# Altium PCB Anemoia-ESP32-SMD.PcbDoc (part 2 of 3)
Units mm, origin at the board's own origin, x right, y up, seen from the top; angles counter-clockwise.
Board outline 118.5 x 51 mm, 2 copper layers (Top Layer, Bottom Layer), stack 1.57 mm thick; 96 components, 75 nets, 376 pads, 286 vias.
Unrouted connection lines stored in the file: 8.
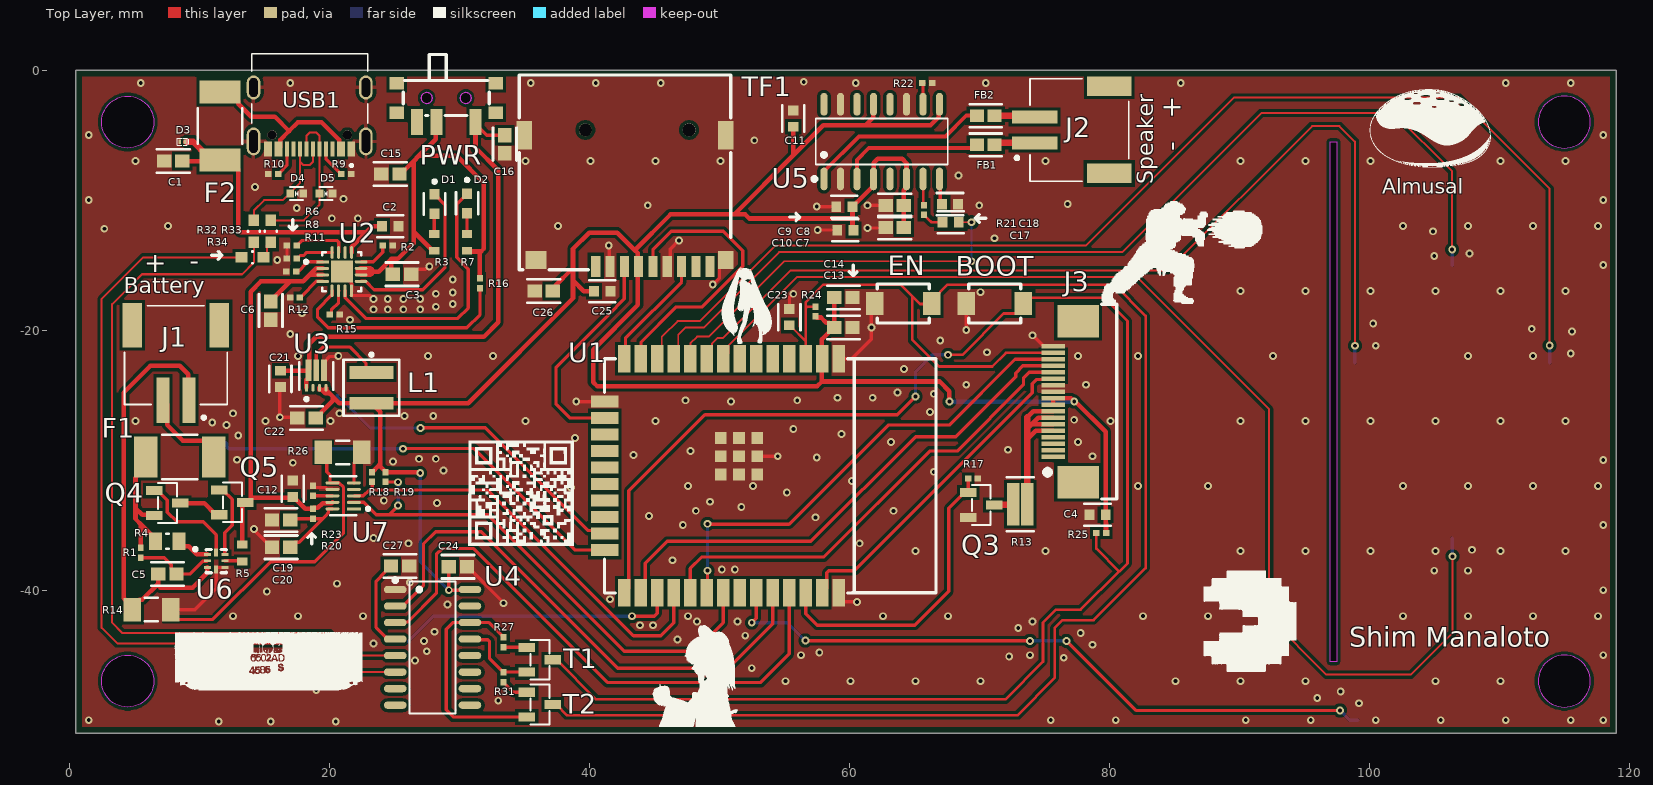
[diagram p0: Top Layer view]

## Part data (continued)
FB1 FB2: library part BLM18EG221SN1D, "Chip Ferrite Bead, 0603, 220Ω @ 100MHz, 0.05Ω, 25%, 2A", Case Code (Imperial)=0603, Case Code (Metric)=1608, Current Rating=1A, DC Current=2A, DC Resistance (DCR)=50mΩ, Frequency=100MHz, Manufacturer=Murata, Max Frequency=1GHz, Max Operating Temperature=125°C, Min Operating Temperature=-55°C, Resistance=220Ω, Tolerance=25%, Case/Package=0603, Category="Ferrite Beads and Chips", ComponentLink1Description=https://datasheet.octopart.com:443/BLM18EG221SN1D-Murata-datasheet-180806761.pdf?src-supplier=IHS, ComponentLink1URL=https://datasheet.octopart.com:443/BLM18EG221SN1D-Murata-datasheet-180806761.pdf?src-supplier=IHS, ComponentLink2Description=https://datasheet.octopart.com:443/BLM18EG221SN1D-Murata-datasheet-113093584.pdf?src-supplier=Ciiva, ComponentLink2URL=https://datasheet.octopart.com:443/BLM18EG221SN1D-Murata-datasheet-113093584.pdf?src-supplier=Ciiva, ComponentLink3Description=https://datasheet.octopart.com:443/BLM18EG221SN1D-Murata-datasheet-141257933.pdf?src-supplier=Ciiva, ComponentLink3URL=https://datasheet.octopart.com:443/BLM18EG221SN1D-Murata-datasheet-141257933.pdf?src-supplier=Ciiva, ComponentLink4Description=https://datasheet.octopart.com:443/BLM18EG221SN1D-Murata-datasheet-138706987.pdf?src-supplier=Ciiva, ComponentLink4URL=https://datasheet.octopart.com:443/BLM18EG221SN1D-Murata-datasheet-138706987.pdf?src-supplier=Ciiva, ComponentLink5Description=https://datasheet.octopart.com:443/BLM18EG221SN1D-Murata-datasheet-66919.pdf?src-supplier=element14+APAC, ComponentLink5URL=https://datasheet.octopart.com:443/BLM18EG221SN1D-Murata-datasheet-66919.pdf?src-supplier=element14+APAC, ComponentLink6Description=https://datasheet.octopart.com:443/BLM18EG221SN1D-Murata-datasheet-11550679.pdf?src-supplier=_legacy+Avnet, ComponentLink6URL=https://datasheet.octopart.com:443/BLM18EG221SN1D-Murata-datasheet-11550679.pdf?src-supplier=_legacy+Avnet, ComponentLink7Description=https://datasheet.octopart.com:443/BLM18EG221SN1D-Murata-datasheet-8330444.pdf?src-supplier=_legacy+Avnet, ComponentLink7URL=https://datasheet.octopart.com:443/BLM18EG221SN1D-Murata-datasheet-8330444.pdf?src-supplier=_legacy+Avnet, ComponentLink8Description=https://datasheet.octopart.com:443/BLM18EG221SN1D-Murata-datasheet-584887.pdf?src-supplier=_legacy+Avnet, ComponentLink8URL=https://datasheet.octopart.com:443/BLM18EG221SN1D-Murata-datasheet-584887.pdf?src-supplier=_legacy+Avnet, ComponentLink9Description=https://datasheet.octopart.com:443/BLM18EG221SN1D-Murata-datasheet-135086659.pdf?src-supplier=TME, ComponentLink9URL=https://datasheet.octopart.com:443/BLM18EG221SN1D-Murata-datasheet-135086659.pdf?src-supplier=TME, ComponentLink10Description=https://datasheet.octopart.com:443/BLM18EG221SN1D-Murata-datasheet-151955971.pdf?src-supplier=SOS+electronic, ComponentLink10URL=https://datasheet.octopart.com:443/BLM18EG221SN1D-Murata-datasheet-151955971.pdf?src-supplier=SOS+electronic, ComponentLink11Description=https://datasheet.octopart.com:443/BLM18EG221SN1D-Murata-datasheet-62086310.pdf?src-supplier=Future+Electronics, ComponentLink11URL=https://datasheet.octopart.com:443/BLM18EG221SN1D-Murata-datasheet-62086310.pdf?src-supplier=Future+Electronics, ComponentLink12Description=https://datasheet.octopart.com/BLM18EG221SN1D-Murata-datasheet-37129980.pdf, ComponentLink12URL=https://datasheet.octopart.com/BLM18EG221SN1D-Murata-datasheet-37129980.pdf, ComponentLink13Description=http://sigma.octopart.com:80/reach_statement/Murata-company-16.pdf?src-supplier=Compliance+Statements, ComponentLink13URL=http://sigma.octopart.com:80/reach_statement/Murata-company-16.pdf?src-supplier=Compliance+Statements, Contact Plating=Tin, Core Material=Ferrite, Depth=800µm, Height=800µm, Impedance=260Ω, Lead Free="Lead Free", Length=1.6mm, Lifecycle Status=Production, Manufacturer Part Number=BLM18EG221SN1D, Material="Ferrite, Steel", Max Current Rating=2A, Max DC Current=2A, Military Standard=Not, Number of Circuits=1, Number of Lines=1, Number of Pins=2, Number of Terminals=2, Packaging="Cut Tape", Radiation Hardening=No, REACH SVHC=Yes, RMS Current (Irms)=2A, RoHS=Compliant, Schedule B="8504500000, 8504500000|8504500000|8504500000|8504500000|8504500000", Series Resistance=50mΩ, Stock 1=154402, Supplier 1=DigiKey, Termination=SMD/SMT, Test Frequency=100MHz, Width=800µm
J1 J2: library part S2B-PH-SM4-TB(LF)(SN), "2P 1x2P PH Tin -25℃~+85℃ Beige 2mm 100V 2 2A 1 Surface Mount, Right Angle SMD,P=2mm,Surface Mount,Right Angle Headers, Male Pins RoHS", Color="Black, White", Contact Resistance=20mΩ, Current Rating=2A, Dielectric Material=Polyamide, Flammability Rating="UL94 V-0", Housing Color=Natural, Insulation Resistance=1GΩ, Manufacturer=JST, Max Operating Temperature=85°C, Max Voltage Rating (AC)=100V, Min Operating Temperature=-25°C, Category="Headers and Wire Housings", China RoHS=Compliant, ComponentLink1Description=https://datasheet.octopart.com:443/S2BPHSM4TBLFSN-JST-datasheet-147762421.pdf?src-supplier=Upverter, ComponentLink1URL=https://datasheet.octopart.com:443/S2BPHSM4TBLFSN-JST-datasheet-147762421.pdf?src-supplier=Upverter, ComponentLink2Description=https://datasheet.octopart.com:443/S2B-PH-SM4-TB%28LF%29%28SN%29-JST-datasheet-10411123.pdf?src-supplier=Upverter, ComponentLink2URL=https://datasheet.octopart.com:443/S2B-PH-SM4-TB%28LF%29%28SN%29-JST-datasheet-10411123.pdf?src-supplier=Upverter, ComponentLink3Description=https://datasheet.octopart.com:443/S2B-PH-SM4-TB%28LF%29%28SN%29-JST-datasheet-8324864.pdf?src-supplier=Upverter, ComponentLink3URL=https://datasheet.octopart.com:443/S2B-PH-SM4-TB%28LF%29%28SN%29-JST-datasheet-8324864.pdf?src-supplier=Upverter, ComponentLink4Description=https://datasheet.octopart.com:443/S2B-PH-SM4-TB%28LF%29%28SN%29-JST-datasheet-180491729.pdf?src-supplier=IHS, ComponentLink4URL=https://datasheet.octopart.com:443/S2B-PH-SM4-TB%28LF%29%28SN%29-JST-datasheet-180491729.pdf?src-supplier=IHS, ComponentLink5Description=https://datasheet.octopart.com:443/S2B-PH-SM4-TB%28LF%29%28SN%29-JST-datasheet-15068535.pdf?src-supplier=SOS+electronic, ComponentLink5URL=https://datasheet.octopart.com:443/S2B-PH-SM4-TB%28LF%29%28SN%29-JST-datasheet-15068535.pdf?src-supplier=SOS+electronic, ComponentLink6Description=https://datasheet.octopart.com:443/S2B-PH-SM4-TB%28LF%29%28SN%29-JST-datasheet-12510261.pdf?src-supplier=TME, ComponentLink6URL=https://datasheet.octopart.com:443/S2B-PH-SM4-TB%28LF%29%28SN%29-JST-datasheet-12510261.pdf?src-supplier=TME, ComponentLink7Description=https://datasheet.octopart.com:443/S2B-PH-SM4-TB%28LF%29%28SN%29-JST-datasheet-56537.pdf?src-supplier=Future+Electronics, ComponentLink7URL=https://datasheet.octopart.com:443/S2B-PH-SM4-TB%28LF%29%28SN%29-JST-datasheet-56537.pdf?src-supplier=Future+Electronics, ComponentLink8Description=https://datasheet.octopart.com:443/S2B-PH-SM4-TB-%28LF%29%28SN%29-JST-datasheet-165061721.pdf?src-supplier=Burklin+Elektronik, ComponentLink8URL=https://datasheet.octopart.com:443/S2B-PH-SM4-TB-%28LF%29%28SN%29-JST-datasheet-165061721.pdf?src-supplier=Burklin+Elektronik, ComponentLink9Description=https://datasheet.octopart.com:443/S2B-PH-SM4-TB%28LF%29%28SN%29-JST-datasheet-515537.pdf?src-supplier=Farnell, ComponentLink9URL=https://datasheet.octopart.com:443/S2B-PH-SM4-TB%28LF%29%28SN%29-JST-datasheet-515537.pdf?src-supplier=Farnell, ComponentLink10Description=https://datasheet.octopart.com:443/S2B-PH-SM4-TB-%28LF%29-%28SN%29-JST-datasheet-159515011.pdf?src-supplier=Amar+Radio+Corporation, ComponentLink10URL=https://datasheet.octopart.com:443/S2B-PH-SM4-TB-%28LF%29-%28SN%29-JST-datasheet-159515011.pdf?src-supplier=Amar+Radio+Corporation, Connector Type="Male Pin", Contact Gender=Male, Contact Material="Bronze, Copper, Tin", Contact Mating Length=3.302mm, Contact Plating=Tin, Depth=7.6mm, Fastening Type=Detent, Gender=Male, Height=5.5mm, Housing Material=Nylon, Lead Free="Lead Free", Lead Pitch=2mm, Length=11.9mm, Lifecycle Status=Production, Manufacturer Part Number=S2B-PH-SM4-TB(LF)(SN), Material=Polyamide, Max Current Rating=2A, Max Voltage Rating (DC)=100V, Mount="Through Hole", Number of Contacts=2, Number of Pins=2, Number of Poles=2, Number of Positions=2, Number of Rows=1, Packaging=Bulk, Pitch=2mm, Radiation Hardening=No, REACH SVHC=Yes, RoHS=Compliant, Stock 1=28429, Supplier 1=Mouser, Terminal Pitch=2mm, Termination="Crimp, Solder", Voltage Rating=100V, Voltage Rating (AC)=100V, Voltage Rating (DC)=100V, Weight=28.349523g, Width=2.34mm, Working Voltage=100V
J3: library part HC-FPC-0.5-18P-CXH20, "CONN FFC FPC 18POS 0.5mm BOTTOM CNT SMD R/A"
L1: library part XFL4015-471MEC, "FIXED IND 470nH SMD,4x4mm"
PWR: library part MK-12C02-G020, "Surface Mount, Right Angle 1A SPDT 6V Black 10,000 Cycles SMD,6.6x1.4mm Slide Switches RoHS"
Q3 Q4 Q5: library part AO3402, "MOSFET N-CH 30V SOT-23"
R1: library part RC0402FR-07300RL, "RES 300Ω ±1% 62.5mW 0402"
R2: library part RC0402FR-071K18L, "RES 1.18kΩ ±1% 62.5mW 0402"
R3 R5 R7: library part RC0603FR-071K5L, "RES 1.5kΩ ±1% 100mW 0603"
R4: library part RC0805FR-0720RL, "RES 20Ω ±1% 125mW 0805"
R6: library part RC0402FR-074K12L, "RES 4.12kΩ ±1% 62.5mW 0402"
R8 R15 R16 R20 R23: library part RC0402FR-071KL, "RES 1kΩ ±1% 62.5mW 0402", Case Code (Imperial)=0402, Manufacturer="Yageo Group", Max Operating Temperature=155°C, Min Operating Temperature=-55°C, Power Dissipation=62.5mW, Power Rating=63mW, Resistance=1kΩ, Temperature Coefficient=100ppm/°C, Tolerance=1%, Voltage Rating=50V, Case Code (Metric)=0402, Case/Package=0402, Category="Chip SMD Resistors", China RoHS=Non-Compliant, ComponentLink1Description=https://datasheet.octopart.com:443/RC0402FR-071KL-Yageo-datasheet-175887523.pdf?src-supplier=IHS, ComponentLink1URL=https://datasheet.octopart.com:443/RC0402FR-071KL-Yageo-datasheet-175887523.pdf?src-supplier=IHS, ComponentLink2Description=https://datasheet.octopart.com:443/RC0402FR-071KL-Yageo-datasheet-164759695.pdf?src-supplier=Upverter, ComponentLink2URL=https://datasheet.octopart.com:443/RC0402FR-071KL-Yageo-datasheet-164759695.pdf?src-supplier=Upverter, ComponentLink3Description=https://datasheet.octopart.com:443/RC0402FR-071KL-Yageo-datasheet-103092701.pdf?src-supplier=Upverter, ComponentLink3URL=https://datasheet.octopart.com:443/RC0402FR-071KL-Yageo-datasheet-103092701.pdf?src-supplier=Upverter, ComponentLink4Description=https://sigma.octopart.com:443/138820526/technical_drawing/Yageo-RC0402FR-071KL.pdf?src-supplier=Upverter, ComponentLink4URL=https://sigma.octopart.com:443/138820526/technical_drawing/Yageo-RC0402FR-071KL.pdf?src-supplier=Upverter, ComponentLink5Description=https://datasheet.octopart.com:443/RC0402FR-071KL-Yageo-datasheet-98239111.pdf?src-supplier=Upverter, ComponentLink5URL=https://datasheet.octopart.com:443/RC0402FR-071KL-Yageo-datasheet-98239111.pdf?src-supplier=Upverter, ComponentLink6Description=https://datasheet.octopart.com:443/RC0402FR-071KL-Yageo-datasheet-10408619.pdf?src-supplier=Newark, ComponentLink6URL=https://datasheet.octopart.com:443/RC0402FR-071KL-Yageo-datasheet-10408619.pdf?src-supplier=Newark, ComponentLink7Description=https://datasheet.octopart.com:443/RC0402FR-071KL-Yageo-datasheet-8324527.pdf?src-supplier=Newark, ComponentLink7URL=https://datasheet.octopart.com:443/RC0402FR-071KL-Yageo-datasheet-8324527.pdf?src-supplier=Newark, ComponentLink8Description=https://datasheet.octopart.com:443/RC0402FR-071KL-Yageo-datasheet-62067350.pdf?src-supplier=Farnell, ComponentLink8URL=https://datasheet.octopart.com:443/RC0402FR-071KL-Yageo-datasheet-62067350.pdf?src-supplier=Farnell, ComponentLink9Description=https://datasheet.octopart.com:443/RC0402FR-071KL-Yageo-datasheet-12531192.pdf?src-supplier=Future+Electronics, ComponentLink9URL=https://datasheet.octopart.com:443/RC0402FR-071KL-Yageo-datasheet-12531192.pdf?src-supplier=Future+Electronics, ComponentLink10Description=https://datasheet.octopart.com:443/RC0402FR-071KL-Yageo-datasheet-137700087.pdf?src-supplier=Future+Electronics, ComponentLink10URL=https://datasheet.octopart.com:443/RC0402FR-071KL-Yageo-datasheet-137700087.pdf?src-supplier=Future+Electronics, ComponentLink11Description=https://datasheet.octopart.com:443/RC0402FR-071KL-Yageo-datasheet-8324255.pdf?src-supplier=Future+Electronics, ComponentLink11URL=https://datasheet.octopart.com:443/RC0402FR-071KL-Yageo-datasheet-8324255.pdf?src-supplier=Future+Electronics, ComponentLink12Description=https://datasheet.octopart.com:443/RC0402FR-071KL-Yageo-datasheet-8329306.pdf?src-supplier=element14, ComponentLink12URL=https://datasheet.octopart.com:443/RC0402FR-071KL-Yageo-datasheet-8329306.pdf?src-supplier=element14, ComponentLink13Description=https://datasheet.octopart.com:443/RC0402FR-071KL-Yageo-datasheet-505231.pdf?src-supplier=element14, ComponentLink13URL=https://datasheet.octopart.com:443/RC0402FR-071KL-Yageo-datasheet-505231.pdf?src-supplier=element14, ComponentLink14Description=https://datasheet.octopart.com:443/RC0402FR-071KL-Yageo-datasheet-175423674.pdf?src-supplier=SOS+electronic, ComponentLink14URL=https://datasheet.octopart.com:443/RC0402FR-071KL-Yageo-datasheet-175423674.pdf?src-supplier=SOS+electronic, ComponentLink15Description=https://datasheet.octopart.com:443/RC0402FR-071KL-Yageo-datasheet-148775077.pdf?src-supplier=TME, ComponentLink15URL=https://datasheet.octopart.com:443/RC0402FR-071KL-Yageo-datasheet-148775077.pdf?src-supplier=TME, ComponentLink16Description=https://datasheet.octopart.com:443/RC0402FR-071KL-Yageo-datasheet-79472498.pdf?src-supplier=Megastar, ComponentLink16URL=https://datasheet.octopart.com:443/RC0402FR-071KL-Yageo-datasheet-79472498.pdf?src-supplier=Megastar, ComponentLink17Description=https://datasheet.octopart.com/RC0402FR-071KL-Yageo-datasheet-73766026.pdf, ComponentLink17URL=https://datasheet.octopart.com/RC0402FR-071KL-Yageo-datasheet-73766026.pdf, ComponentLink18Description=http://sigma.octopart.com:80/rohs_statement/Yageo-company-2.pdf?src-supplier=Compliance+Statements, ComponentLink18URL=http://sigma.octopart.com:80/rohs_statement/Yageo-company-2.pdf?src-supplier=Compliance+Statements, ComponentLink19Description=http://sigma.octopart.com:80/conflict_mineral_statement/Yageo-company-3.pdf?src-supplier=Compliance+Statements, ComponentLink19URL=http://sigma.octopart.com:80/conflict_mineral_statement/Yageo-company-3.pdf?src-supplier=Compliance+Statements, Composition="Thick Film", Depth=500µm, Height=350µm, Lead Free="Lead Free", Length=1mm, Lifecycle Status=Production, Manufacturer Part Number=RC0402FR-071KL, Military Standard=Not, Mount="Surface Mount", Number of Pins=2, Number of Terminals=2, Packaging="Tape & Reel", REACH SVHC=Yes, RoHS=Compliant, Schedule B="8533210045, 8533210045|8533210045|8533210045|8533210045|8533210045|8533210045|8533210045|8533210045|8533210045|8533210045|8533210045|8533210045|8533210045|8533210045|8533210045|8533210045|8533210045|8533210045|8533210045|8533210045|8533210045|8533210045|8533210045|85", Stock 1=3526698, Supplier 1=DigiKey, Termination=SMD/SMT, Voltage Rating (AC)=50V, Voltage Rating (DC)=50V, Width=500µm, Working Voltage=50V
R9 R10 R18 R19: library part RC0402FR-075K1L, "RES 5.1kΩ ±1% 62.5mW 0402"
R11 R12 R17 R21 R22 R24 R25 R27 R31: library part RC0402FR-0710KL, "RES 10K OHM 1% 1/16W 0402", Case Code (Imperial)=0402, Manufacturer="Yageo Group", Max Operating Temperature=155°C, Min Operating Temperature=-55°C, Power Dissipation=62.5mW, Power Rating=63mW, Resistance=10kΩ, Temperature Coefficient=100ppm/°C, Tolerance=1%, Voltage Rating=50V, Case Code (Metric)=0402, Case/Package=0402, Category="Chip SMD Resistors", China RoHS=Non-Compliant, ComponentLink1Description=https://datasheet.octopart.com:443/RC0402FR-0710KL-Yageo-datasheet-175887523.pdf?src-supplier=Newark, ComponentLink1URL=https://datasheet.octopart.com:443/RC0402FR-0710KL-Yageo-datasheet-175887523.pdf?src-supplier=Newark, ComponentLink2Description=https://datasheet.octopart.com:443/RC0402FR-0710KL-Yageo-datasheet-12531192.pdf?src-supplier=Newark, ComponentLink2URL=https://datasheet.octopart.com:443/RC0402FR-0710KL-Yageo-datasheet-12531192.pdf?src-supplier=Newark, ComponentLink3Description=https://datasheet.octopart.com:443/RC0402FR-0710KL-Yageo-datasheet-8324527.pdf?src-supplier=Newark, ComponentLink3URL=https://datasheet.octopart.com:443/RC0402FR-0710KL-Yageo-datasheet-8324527.pdf?src-supplier=Newark, ComponentLink4Description=https://datasheet.octopart.com:443/RC0402FR-0710KL-Yageo-datasheet-10408619.pdf?src-supplier=element14+APAC, ComponentLink4URL=https://datasheet.octopart.com:443/RC0402FR-0710KL-Yageo-datasheet-10408619.pdf?src-supplier=element14+APAC, ComponentLink5Description=https://datasheet.octopart.com:443/RC0402FR-0710KL-Yageo-datasheet-62067350.pdf?src-supplier=element14+APAC, ComponentLink5URL=https://datasheet.octopart.com:443/RC0402FR-0710KL-Yageo-datasheet-62067350.pdf?src-supplier=element14+APAC, ComponentLink6Description=https://datasheet.octopart.com:443/RC0402FR-0710KL-Yageo-datasheet-21426659.pdf?src-supplier=element14+APAC, ComponentLink6URL=https://datasheet.octopart.com:443/RC0402FR-0710KL-Yageo-datasheet-21426659.pdf?src-supplier=element14+APAC, ComponentLink7Description=https://datasheet.octopart.com:443/RC0402FR-0710KL-Yageo-datasheet-164759695.pdf?src-supplier=Upverter, ComponentLink7URL=https://datasheet.octopart.com:443/RC0402FR-0710KL-Yageo-datasheet-164759695.pdf?src-supplier=Upverter, ComponentLink8Description=https://datasheet.octopart.com:443/RC0402FR-0710KL-Yageo-datasheet-103092701.pdf?src-supplier=Upverter, ComponentLink8URL=https://datasheet.octopart.com:443/RC0402FR-0710KL-Yageo-datasheet-103092701.pdf?src-supplier=Upverter, ComponentLink9Description=https://sigma.octopart.com:443/138820526/technical_drawing/Yageo-RC0402FR-0710KL.pdf?src-supplier=Upverter, ComponentLink9URL=https://sigma.octopart.com:443/138820526/technical_drawing/Yageo-RC0402FR-0710KL.pdf?src-supplier=Upverter, ComponentLink10Description=https://datasheet.octopart.com:443/RC0402FR-0710KL-Yageo-datasheet-98239111.pdf?src-supplier=Upverter, ComponentLink10URL=https://datasheet.octopart.com:443/RC0402FR-0710KL-Yageo-datasheet-98239111.pdf?src-supplier=Upverter, ComponentLink11Description=https://datasheet.octopart.com:443/RC0402FR-0710KL-Yageo-datasheet-68298067.pdf?src-supplier=Upverter, ComponentLink11URL=https://datasheet.octopart.com:443/RC0402FR-0710KL-Yageo-datasheet-68298067.pdf?src-supplier=Upverter, ComponentLink12Description=https://datasheet.octopart.com:443/RC0402FR-0710KL-Yageo-datasheet-68297981.pdf?src-supplier=Upverter, ComponentLink12URL=https://datasheet.octopart.com:443/RC0402FR-0710KL-Yageo-datasheet-68297981.pdf?src-supplier=Upverter, ComponentLink13Description=https://datasheet.octopart.com:443/RC0402FR-0710KL-Yageo-datasheet-141435361.pdf?src-supplier=Upverter, ComponentLink13URL=https://datasheet.octopart.com:443/RC0402FR-0710KL-Yageo-datasheet-141435361.pdf?src-supplier=Upverter, ComponentLink14Description=https://datasheet.octopart.com:443/RC0402FR-0710KL-Yageo-datasheet-12509768.pdf?src-supplier=Upverter, ComponentLink14URL=https://datasheet.octopart.com:443/RC0402FR-0710KL-Yageo-datasheet-12509768.pdf?src-supplier=Upverter, ComponentLink15Description=https://datasheet.octopart.com:443/RC0402FR-0710KL-Yageo-datasheet-8329306.pdf?src-supplier=element14, ComponentLink15URL=https://datasheet.octopart.com:443/RC0402FR-0710KL-Yageo-datasheet-8329306.pdf?src-supplier=element14, ComponentLink16Description=https://datasheet.octopart.com:443/RC0402FR-0710KL-Yageo-datasheet-505231.pdf?src-supplier=element14, ComponentLink16URL=https://datasheet.octopart.com:443/RC0402FR-0710KL-Yageo-datasheet-505231.pdf?src-supplier=element14, ComponentLink17Description=https://datasheet.octopart.com:443/RC0402FR-0710KL-Yageo-datasheet-175423674.pdf?src-supplier=SOS+electronic, ComponentLink17URL=https://datasheet.octopart.com:443/RC0402FR-0710KL-Yageo-datasheet-175423674.pdf?src-supplier=SOS+electronic, ComponentLink18Description=https://datasheet.octopart.com:443/RC0402FR-0710KL-Yageo-datasheet-137700087.pdf?src-supplier=Future+Electronics, ComponentLink18URL=https://datasheet.octopart.com:443/RC0402FR-0710KL-Yageo-datasheet-137700087.pdf?src-supplier=Future+Electronics, ComponentLink19Description=https://datasheet.octopart.com:443/RC0402FR-0710KL-Yageo-datasheet-8324255.pdf?src-supplier=Future+Electronics, ComponentLink19URL=https://datasheet.octopart.com:443/RC0402FR-0710KL-Yageo-datasheet-8324255.pdf?src-supplier=Future+Electronics, ComponentLink20Description=https://datasheet.octopart.com:443/RC0402FR-0710KL-Yageo-datasheet-79472498.pdf?src-supplier=Megastar, ComponentLink20URL=https://datasheet.octopart.com:443/RC0402FR-0710KL-Yageo-datasheet-79472498.pdf?src-supplier=Megastar, ComponentLink21Description=https://datasheet.octopart.com/RC0402FR-0710KL-Yageo-datasheet-73766026.pdf, ComponentLink21URL=https://datasheet.octopart.com/RC0402FR-0710KL-Yageo-datasheet-73766026.pdf, ComponentLink22Description=http://sigma.octopart.com:80/conflict_mineral_statement/Yageo-company-3.pdf?src-supplier=Compliance+Statements, ComponentLink22URL=http://sigma.octopart.com:80/conflict_mineral_statement/Yageo-company-3.pdf?src-supplier=Compliance+Statements, ComponentLink23Description=http://sigma.octopart.com:80/rohs_statement/Yageo-company-2.pdf?src-supplier=Compliance+Statements, ComponentLink23URL=http://sigma.octopart.com:80/rohs_statement/Yageo-company-2.pdf?src-supplier=Compliance+Statements, Composition="Thick Film", Depth=500µm, Height=350µm, Lead Free="Lead Free", Lead Pitch=200µm, Length=1mm, Lifecycle Status=Production, Manufacturer Part Number=RC0402FR-0710KL, Military Standard=Not, Mount="Surface Mount", Number of Pins=2, Number of Terminals=2, Number of Terminations=2, Packaging="Tape & Reel", REACH SVHC=Yes, RoHS=Compliant, Schedule B="8533210045, 8533210045|8533210045|8533210045|8533210045|8533210045|8533210045|8533210045|8533210045|8533210045|8533210045|8533210045|8533210045|8533210045|8533210045, 8533210045|8533210045|8533210045|8533210045|8533210045|8533210045|8533210045|8533210045|8533210045|8533210045|8533210045|8533210045|8533210045|8533210045|8533210045, 8533210045|8533210045|8533210045|8533210045|8533210045|8533210045|8533210045|8533210045|8533210045|8533210045|8533210045|8533210045|8533210045|8533210045|8533210045|8533210045", Stock 1=8175534, Supplier 1=DigiKey, Termination=SMD/SMT, Voltage Rating (DC)=50V, Width=500µm, Working Voltage=50V
R13: library part LTR18EZPJ3R9, "RES 3.9Ω ±5% 750mW 0612", Case/Package=0612, Manufacturer=ROHM, Max Operating Temperature=155°C, Min Operating Temperature=-55°C, Power Dissipation=750mW, Temperature Coefficient=200ppm/°C, Tolerance=5%, Voltage Rating=200V, Category="Chip SMD Resistors", ComponentLink1Description=https://datasheet.octopart.com:443/LTR18EZPJ3R9-ROHM-datasheet-168137580.pdf?src-supplier=IHS, ComponentLink1URL=https://datasheet.octopart.com:443/LTR18EZPJ3R9-ROHM-datasheet-168137580.pdf?src-supplier=IHS, Composition="Thick Film", Height=550µm, Lifecycle Status=Production, Manufacturer Part Number=LTR18EZPJ3R9, Mount="Surface Mount", Number of Terminals=2, Power Rating=750mW, REACH SVHC=Yes, Resistance=3.9Ω, RoHS=Compliant, Stock 1=4914, Supplier 1=Mouser, Width=1.6mm, Working Voltage=200V
R14: library part FRM121WFR001TM, "RES 1mΩ ±1% 1W 1206"
R26: library part FRM121WFR020TM, "RES 20mΩ ±1% 1W 1206"
R32 R33 R34: library part RC0603FR-070RL, "RES 0Ω ±1% 100mW 0603", Case Code (Imperial)=0603, Current Rating=1A, Manufacturer="Yageo Group", Max Operating Temperature=155°C, Max Power Dissipation=100mW, Min Operating Temperature=-55°C, Resistance=0Ω, Temperature Coefficient=200ppm/°C, Tolerance=1%, Voltage Rating=75V, Voltage Rating (DC)=50V, Case/Package=0603, Category="Chip SMD Resistors", China RoHS=Non-Compliant, ComponentLink1Description=https://datasheet.octopart.com:443/RC0603FR-070RL-Yageo-datasheet-127823281.pdf?src-supplier=Upverter, ComponentLink1URL=https://datasheet.octopart.com:443/RC0603FR-070RL-Yageo-datasheet-127823281.pdf?src-supplier=Upverter, ComponentLink2Description=https://datasheet.octopart.com:443/RC0603FR-070RL-Yageo-datasheet-30459151.pdf?src-supplier=IHS, ComponentLink2URL=https://datasheet.octopart.com:443/RC0603FR-070RL-Yageo-datasheet-30459151.pdf?src-supplier=IHS, ComponentLink3Description=https://datasheet.octopart.com:443/RC0603FR-070RL-Yageo-datasheet-8328172.pdf?src-supplier=element14+APAC, ComponentLink3URL=https://datasheet.octopart.com:443/RC0603FR-070RL-Yageo-datasheet-8328172.pdf?src-supplier=element14+APAC, ComponentLink4Description=https://datasheet.octopart.com:443/RC0603FR-070RL-Yageo-datasheet-34211833.pdf?src-supplier=Newark, ComponentLink4URL=https://datasheet.octopart.com:443/RC0603FR-070RL-Yageo-datasheet-34211833.pdf?src-supplier=Newark, ComponentLink5Description=https://datasheet.octopart.com:443/RC0603FR-070RL-Yageo-datasheet-164759695.pdf?src-supplier=Future+Electronics, ComponentLink5URL=https://datasheet.octopart.com:443/RC0603FR-070RL-Yageo-datasheet-164759695.pdf?src-supplier=Future+Electronics, ComponentLink6Description=https://datasheet.octopart.com:443/RC0603FR-070RL-Yageo-datasheet-137700087.pdf?src-supplier=Future+Electronics, ComponentLink6URL=https://datasheet.octopart.com:443/RC0603FR-070RL-Yageo-datasheet-137700087.pdf?src-supplier=Future+Electronics, ComponentLink7Description=https://datasheet.octopart.com:443/RC0603FR-070RL-Yageo-datasheet-15599030.pdf?src-supplier=Future+Electronics, ComponentLink7URL=https://datasheet.octopart.com:443/RC0603FR-070RL-Yageo-datasheet-15599030.pdf?src-supplier=Future+Electronics, ComponentLink8Description=https://datasheet.octopart.com:443/RC0603FR-070RL-Yageo-datasheet-12596169.pdf?src-supplier=Future+Electronics, ComponentLink8URL=https://datasheet.octopart.com:443/RC0603FR-070RL-Yageo-datasheet-12596169.pdf?src-supplier=Future+Electronics, ComponentLink9Description=https://datasheet.octopart.com/RC0603FR-070RL-Yageo-datasheet-73766026.pdf, ComponentLink9URL=https://datasheet.octopart.com/RC0603FR-070RL-Yageo-datasheet-73766026.pdf, ComponentLink10Description=http://sigma.octopart.com:80/conflict_mineral_statement/Yageo-company-3.pdf?src-supplier=Compliance+Statements, ComponentLink10URL=http://sigma.octopart.com:80/conflict_mineral_statement/Yageo-company-3.pdf?src-supplier=Compliance+Statements, ComponentLink11Description=http://sigma.octopart.com:80/rohs_statement/Yageo-company-2.pdf?src-supplier=Compliance+Statements, ComponentLink11URL=http://sigma.octopart.com:80/rohs_statement/Yageo-company-2.pdf?src-supplier=Compliance+Statements, Composition="Thick Film", Contact Plating=Tin, Depth=800µm, Features="Moisture Resistant", Height=450µm, Lead Free="Lead Free", Length=1.6mm, Lifecycle Status=Production, Manufacturer Part Number=RC0603FR-070RL, Military Standard=Not, Mount="Surface Mount", Number of Pins=2, Number of Terminals=2, Number of Terminations=2, Packaging="Tape & Reel", Power Dissipation=100mW, Power Rating=100mW, Radiation Hardening=No, REACH SVHC=Yes, RoHS=Compliant, Schedule B="8533210045, 8533210045|8533210045|8533210045|8533210045|8533210045", Stock 1=124388, Supplier 1=Avnet, Termination=SMD/SMT, Width=800µm, Working Voltage=75V
T1 T2: "TRANS NPN 25V 800mA SOT-23"
TF1: "Push-Push 1.8mm MicroSD Card (TF Card) SMD PC Card Sockets RoHS"
U1: "WLAN+BT Module 2412MHz to 2484MHz 47-Pin SMD Module", Manufacturer="Espressif Systems", Max Operating Temperature=85°C, Max Supply Voltage=3.6V, Min Operating Temperature=-40°C, Min Supply Voltage=3V, Operating Supply Voltage=3.3V, Supplier Part Number 1=1965-ESP32-WROOM-32E-N4CT-ND, Category="RF Transceiver Modules and Modems", ComponentLink1Description=https://datasheet.octopart.com:443/ESP32-WROOM-32E-N4-Espressif-Systems-datasheet-182247776.pdf?src-supplier=IHS, ComponentLink1URL=https://datasheet.octopart.com:443/ESP32-WROOM-32E-N4-Espressif-Systems-datasheet-182247776.pdf?src-supplier=IHS, ComponentLink2Description=https://datasheet.octopart.com:443/ESP32-WROOM-32E-N4-Espressif-Systems-datasheet-188867343.pdf?src-supplier=TME, ComponentLink2URL=https://datasheet.octopart.com:443/ESP32-WROOM-32E-N4-Espressif-Systems-datasheet-188867343.pdf?src-supplier=TME, ComponentLink3Description=https://datasheet.octopart.com:443/ESP32-WROOM-32E-N4-Espressif-Systems-datasheet-165560559.pdf?src-supplier=TME, ComponentLink3URL=https://datasheet.octopart.com:443/ESP32-WROOM-32E-N4-Espressif-Systems-datasheet-165560559.pdf?src-supplier=TME, ComponentLink4Description=https://datasheet.octopart.com:443/ESP32-WROOM-32E-N4-Espressif-Systems-datasheet-151884363.pdf?src-supplier=Future+Electronics, ComponentLink4URL=https://datasheet.octopart.com:443/ESP32-WROOM-32E-N4-Espressif-Systems-datasheet-151884363.pdf?src-supplier=Future+Electronics, Height - Seated (Max)=3.25mm, Length=25.5mm, Manufacturer Part Number=ESP32-WROOM-32E-N4, Number of Terminals=38, RoHS=Compliant, Stock 1=14375, Supplier 1=DigiKey, Terminal Pitch=1.27mm, Width=18mm
U2: "IC BATT CHG LI-ION 1CELL 16QFN", Battery Pack Voltage=4.2V, Case/Package=VQFN, Manufacturer="Texas Instruments", Manufacturer Lifecycle Status=ACTIVE, Max Charge Current=1.5A, Max Junction Temperature (Tj)=125°C, Max Operating Temperature=85°C, Max Supply Voltage=26V, Min Input Voltage=4.3V, Min Operating Temperature=-40°C, Min Supply Voltage=4.35V, Nominal Input Voltage=10.2V, Nominal Supply Current=1.5mA, Output Current=4.5A, Output Voltage=4.4V, Category="Battery Management", ComponentLink1Description=https://sigma.octopart.com:443/68310154/technical_drawing/Texas-Instruments-BQ24074RGTR.pdf?src-supplier=Texas+Instruments, ComponentLink1URL=https://sigma.octopart.com:443/68310154/technical_drawing/Texas-Instruments-BQ24074RGTR.pdf?src-supplier=Texas+Instruments, ComponentLink2Description=https://octopart.com:443/opatz8j6/c1?t=LI6ofj69sjsi_xI-KCRS32YmFkc6PT_npiBGUljbX42Z0BJJByqH_j_BDc6kYD6Eat0jCYrMh4TufOjWAhSEeoHRaPevcbfoTFbNgKFqKFSJyet90_ee_lMlYjJX60zLOSdH2MDfXXxrbeY54JkgwoMaRii8bRM8dy3Hup1_4k0sdOE1ly5WLodxihE6XQQf4-0AX14FQY1Zpi93zFashd_QXSp6UW_oM1D47aC421vpmwU9JfP_2WyTHqXyLnxVXQKU6NISI5jvI_zXQBp__czZR7PxssDrGT_L0sVVqAlxkZPKysANPn2yYv6hgsyRXqVf_F6izNr7U4_rFkcyJWP_9JNu77IKMtSnY067jtJjumLI24vxgswM5n7dL12CtrIuz8I&src-supplier=Texas+Instruments, ComponentLink2URL=https://octopart.com:443/opatz8j6/c1?t=LI6ofj69sjsi_xI-KCRS32YmFkc6PT_npiBGUljbX42Z0BJJByqH_j_BDc6kYD6Eat0jCYrMh4TufOjWAhSEeoHRaPevcbfoTFbNgKFqKFSJyet90_ee_lMlYjJX60zLOSdH2MDfXXxrbeY54JkgwoMaRii8bRM8dy3Hup1_4k0sdOE1ly5WLodxihE6XQQf4-0AX14FQY1Zpi93zFashd_QXSp6UW_oM1D47aC421vpmwU9JfP_2WyTHqXyLnxVXQKU6NISI5jvI_zXQBp__czZR7PxssDrGT_L0sVVqAlxkZPKysANPn2yYv6hgsyRXqVf_F6izNr7U4_rFkcyJWP_9JNu77IKMtSnY067jtJjumLI24vxgswM5n7dL12CtrIuz8I&src-supplier=Texas+Instruments, ComponentLink3Description=https://datasheet.octopart.com:443/BQ24074RGTR-Texas-Instruments-datasheet-38229648.pdf?src-supplier=Texas+Instruments, ComponentLink3URL=https://datasheet.octopart.com:443/BQ24074RGTR-Texas-Instruments-datasheet-38229648.pdf?src-supplier=Texas+Instruments, ComponentLink4Description=https://datasheet.octopart.com:443/BQ24074RGTR-Texas-Instruments-datasheet-37101711.pdf?src-supplier=Texas+Instruments, ComponentLink4URL=https://datasheet.octopart.com:443/BQ24074RGTR-Texas-Instruments-datasheet-37101711.pdf?src-supplier=Texas+Instruments, ComponentLink5Description=https://datasheet.octopart.com:443/BQ24074RGTR-Texas-Instruments-datasheet-21772815.pdf?src-supplier=Texas+Instruments, ComponentLink5URL=https://datasheet.octopart.com:443/BQ24074RGTR-Texas-Instruments-datasheet-21772815.pdf?src-supplier=Texas+Instruments, ComponentLink6Description=https://sigma.octopart.com:443/49250272/technical_drawing/Texas-Instruments-BQ24074RGTR.pdf?src-supplier=Texas+Instruments, ComponentLink6URL=https://sigma.octopart.com:443/49250272/technical_drawing/Texas-Instruments-BQ24074RGTR.pdf?src-supplier=Texas+Instruments, ComponentLink7Description=https://datasheet.octopart.com:443/BQ24074RGTR-Texas-Instruments-datasheet-10284113.pdf?src-supplier=Texas+Instruments, ComponentLink7URL=https://datasheet.octopart.com:443/BQ24074RGTR-Texas-Instruments-datasheet-10284113.pdf?src-supplier=Texas+Instruments, ComponentLink8Description=https://datasheet.octopart.com:443/BQ24074RGTR-Texas-Instruments-datasheet-10253851.pdf?src-supplier=Texas+Instruments, ComponentLink8URL=https://datasheet.octopart.com:443/BQ24074RGTR-Texas-Instruments-datasheet-10253851.pdf?src-supplier=Texas+Instruments, ComponentLink9Description=https://datasheet.octopart.com:443/BQ24074RGTR-Texas-Instruments-datasheet-16079513.pdf?src-supplier=Newark, ComponentLink9URL=https://datasheet.octopart.com:443/BQ24074RGTR-Texas-Instruments-datasheet-16079513.pdf?src-supplier=Newark, ComponentLink10Description=https://datasheet.octopart.com:443/BQ24074RGTR-Texas-Instruments-datasheet-165803752.pdf?src-supplier=LCSC, ComponentLink10URL=https://datasheet.octopart.com:443/BQ24074RGTR-Texas-Instruments-datasheet-165803752.pdf?src-supplier=LCSC, ComponentLink11Description=https://datasheet.octopart.com:443/BQ24074RGTR-Texas-Instruments-datasheet-163726753.pdf?src-supplier=LCSC, ComponentLink11URL=https://datasheet.octopart.com:443/BQ24074RGTR-Texas-Instruments-datasheet-163726753.pdf?src-supplier=LCSC, ComponentLink12Description=https://datasheet.octopart.com:443/BQ24074RGTR-Texas-Instruments-datasheet-164412844.pdf?src-supplier=SHENGYU+ELECTRONICS, ComponentLink12URL=https://datasheet.octopart.com:443/BQ24074RGTR-Texas-Instruments-datasheet-164412844.pdf?src-supplier=SHENGYU+ELECTRONICS, ComponentLink13Description=https://datasheet.octopart.com:443/BQ24074RGTR-Texas-Instruments-datasheet-14154534.pdf?src-supplier=iiiC, ComponentLink13URL=https://datasheet.octopart.com:443/BQ24074RGTR-Texas-Instruments-datasheet-14154534.pdf?src-supplier=iiiC, ComponentLink14Description=http://sigma.octopart.com:80/conflict_mineral_statement/Texas-Instruments-company-63.pdf?src-supplier=Compliance+Statements, ComponentLink14URL=http://sigma.octopart.com:80/conflict_mineral_statement/Texas-Instruments-company-63.pdf?src-supplier=Compliance+Statements, ComponentLink15Description=http://sigma.octopart.com:80/reach_statement/Texas-Instruments-company-64.pdf?src-supplier=Compliance+Statements, ComponentLink15URL=http://sigma.octopart.com:80/reach_statement/Texas-Instruments-company-64.pdf?src-supplier=Compliance+Statements, Contact Plating=Gold, Fault Protection="Over Temperature, Over Voltage, Reverse Current, Short Circuit", Height=1mm, Interface=USB, Lead Free="Lead Free", Length=3mm, Lifecycle Status=Production, Manufacturer Part Number=BQ24074RGTR, Number of Cells=1, Number of Outputs=1, Number of Pins=16, Radiation Hardening=No, RoHS=Compliant, Schedule B="8542390000, 8542390000|8542390000|8542390000|8542390000|8542390000", Stock 1=11549, Supplier 1=DigiKey, Thickness=900µm, Weight=22.906415mg, Width=3mm
U3: library part TPS62086RLTR, "2.4MHz Buck 3A Fixed 3.3V 1 VSON-7(2x2) Voltage Regulators - DC DC Switching Regulators RoHS", Case/Package=VQFN, Manufacturer="Texas Instruments", Manufacturer Lifecycle Status=ACTIVE, Max Input Voltage=6V, Max Junction Temperature (Tj)=125°C, Max Output Current=3A, Min Input Voltage=2.5V, Min Operating Temperature=-40°C, Min Output Voltage=3.3V, Nominal Supply Current=17µA, Switching Frequency=2.4MHz, Category="Voltage Regulators - Switching", ComponentLink1Description=https://octopart.com:443/opatz8j6/c1?t=zLf386fj0ibO5NaoSy2k8jd9nPNwEci5YYQicrbra0aFWFytLsUdbb0hTUDDaANyQQwBDYr7V3QKionmdZsJJXUYtB0NJgYjWz6oQuqaUgS5j9X-IyE01ALEJilTv_Q5C8KDVlxq14opzcnp7e_8Z4Mt-FTf3BrnMs1wWLAliJmyVZc25-BOlLyFKzDSwYyB2OqCuUck4xbtoc4mzyJqMrEioRwdgPXnEEA5Fpne0hjuF2kVbuuQmyzQeTHLPqQbzh6zJgaGUw7h6LtPvYTOUam0V6jMwSPu6xRcMnLbqQAHLiEwM3xTlXESrJQ9Z8a77dbxqkQD7BdH-9uuMFmviXkyeikfzgO4zKLpPyqxQRTxO0Tumvj-BoCeSJR17CuUm98-PX99&src-supplier=Texas+Instruments, ComponentLink1URL=https://octopart.com:443/opatz8j6/c1?t=zLf386fj0ibO5NaoSy2k8jd9nPNwEci5YYQicrbra0aFWFytLsUdbb0hTUDDaANyQQwBDYr7V3QKionmdZsJJXUYtB0NJgYjWz6oQuqaUgS5j9X-IyE01ALEJilTv_Q5C8KDVlxq14opzcnp7e_8Z4Mt-FTf3BrnMs1wWLAliJmyVZc25-BOlLyFKzDSwYyB2OqCuUck4xbtoc4mzyJqMrEioRwdgPXnEEA5Fpne0hjuF2kVbuuQmyzQeTHLPqQbzh6zJgaGUw7h6LtPvYTOUam0V6jMwSPu6xRcMnLbqQAHLiEwM3xTlXESrJQ9Z8a77dbxqkQD7BdH-9uuMFmviXkyeikfzgO4zKLpPyqxQRTxO0Tumvj-BoCeSJR17CuUm98-PX99&src-supplier=Texas+Instruments, ComponentLink2Description=https://sigma.octopart.com:443/62099402/technical_drawing/Texas-Instruments-TPS62086RLTR.pdf?src-supplier=Texas+Instruments, ComponentLink2URL=https://sigma.octopart.com:443/62099402/technical_drawing/Texas-Instruments-TPS62086RLTR.pdf?src-supplier=Texas+Instruments, ComponentLink3Description=https://datasheet.octopart.com:443/TPS62086RLTR-Texas-Instruments-datasheet-41218635.pdf?src-supplier=Texas+Instruments, ComponentLink3URL=https://datasheet.octopart.com:443/TPS62086RLTR-Texas-Instruments-datasheet-41218635.pdf?src-supplier=Texas+Instruments, ComponentLink4Description=https://sigma.octopart.com:443/49261848/technical_drawing/Texas-Instruments-TPS62086RLTR.pdf?src-supplier=Texas+Instruments, ComponentLink4URL=https://sigma.octopart.com:443/49261848/technical_drawing/Texas-Instruments-TPS62086RLTR.pdf?src-supplier=Texas+Instruments, ComponentLink5Description=https://datasheet.octopart.com:443/TPS62086RLTR-Texas-Instruments-datasheet-21096292.pdf?src-supplier=Texas+Instruments, ComponentLink5URL=https://datasheet.octopart.com:443/TPS62086RLTR-Texas-Instruments-datasheet-21096292.pdf?src-supplier=Texas+Instruments, ComponentLink6Description=https://datasheet.octopart.com:443/TPS62086RLTR-Texas-Instruments-datasheet-148807817.pdf?src-supplier=Upverter, ComponentLink6URL=https://datasheet.octopart.com:443/TPS62086RLTR-Texas-Instruments-datasheet-148807817.pdf?src-supplier=Upverter, ComponentLink7Description=https://datasheet.octopart.com:443/TPS62086RLTR-Texas-Instruments-datasheet-165804823.pdf?src-supplier=LCSC, ComponentLink7URL=https://datasheet.octopart.com:443/TPS62086RLTR-Texas-Instruments-datasheet-165804823.pdf?src-supplier=LCSC, ComponentLink8Description=https://datasheet.octopart.com:443/TPS62086RLTR-Texas-Instruments-datasheet-159118203.pdf?src-supplier=LCSC, ComponentLink8URL=https://datasheet.octopart.com:443/TPS62086RLTR-Texas-Instruments-datasheet-159118203.pdf?src-supplier=LCSC, ComponentLink9Description=https://datasheet.octopart.com:443/TPS62086RLTR-Texas-Instruments-datasheet-140571925.pdf?src-supplier=Arrow.cn, ComponentLink9URL=https://datasheet.octopart.com:443/TPS62086RLTR-Texas-Instruments-datasheet-140571925.pdf?src-supplier=Arrow.cn, ComponentLink10Description=http://sigma.octopart.com:80/conflict_mineral_statement/Texas-Instruments-company-63.pdf?src-supplier=Compliance+Statements, ComponentLink10URL=http://sigma.octopart.com:80/conflict_mineral_statement/Texas-Instruments-company-63.pdf?src-supplier=Compliance+Statements, ComponentLink11Description=http://sigma.octopart.com:80/reach_statement/Texas-Instruments-company-64.pdf?src-supplier=Compliance+Statements, ComponentLink11URL=http://sigma.octopart.com:80/reach_statement/Texas-Instruments-company-64.pdf?src-supplier=Compliance+Statements, Efficiency=95%, Height=1mm, Lead Free="Lead Free", Length=2mm, Lifecycle Status=Production, Manufacturer Part Number=TPS62086RLTR, Max Duty Cycle=100%, Max Operating Temperature=125°C, Max Supply Voltage=6V, Min Supply Voltage=2.5V, Mount="Surface Mount", Number of Outputs=1, Number of Pins=7, Operating Supply Voltage=6V, Output Configuration=Positive, Output Current=3A, Output Type=Fixed, Output Voltage=3.3V, Packaging="Tape & Reel (TR)", Radiation Hardening=No, RoHS=Compliant, Schedule B="8542390000, 8542390000|8542390000|8542390000|8542390000|8542390000", Stock 1=149, Supplier 1=DigiKey, Synchronous Rectifier=Yes, Thickness=900µm, Topology=Buck, Width=2mm
U4: "USB to Serial Port chip"
U5: "5W Stereo Audio Amplifier"
U6: "High-side protector for single-cell li-ion and li-polymer batteries 8-X2QFN -40 to 85", Manufacturer="Texas Instruments", Manufacturer Lifecycle Status=ACTIVE, Category="Battery Management", ComponentLink1Description=https://octopart.com:443/opatz8j6/c1?t=T8xnCfae14IwXQKSc9tc1cECohJW915yjJ4UmEV36YlG2Lcn9JmbrueTsSySX1snmslRAmjkKezbP2FQktfpvE4FxpnhBxPkuxdhviTsLwxAqvIaIPIfA7-ivJz-FRj0uvn1B4WdmQtll-eyAmX2uKug_srjN1ursqrCW3CFz78tHDRhd8xhc5XYMdKX_d_zjXgQxuFLV-MSsMN0bUNv-iDO2U21z1yuI-xhuurlNASwlTI6GuzMI2GRxoCrYjJZgdn0XkVanL-OCxNHJv-vZ4yWy-PtCSkDUIxCOjXzuZBin09vjep-IU_Lnee7eGBGbL1QY_aCOVuu7U0jReiKM9X30uw55sJ3CJJcoHVcpW3QhWGnW2OPZWYYfkIxPRsMbP82pN8&src-supplier=Texas+Instruments, ComponentLink1URL=https://octopart.com:443/opatz8j6/c1?t=T8xnCfae14IwXQKSc9tc1cECohJW915yjJ4UmEV36YlG2Lcn9JmbrueTsSySX1snmslRAmjkKezbP2FQktfpvE4FxpnhBxPkuxdhviTsLwxAqvIaIPIfA7-ivJz-FRj0uvn1B4WdmQtll-eyAmX2uKug_srjN1ursqrCW3CFz78tHDRhd8xhc5XYMdKX_d_zjXgQxuFLV-MSsMN0bUNv-iDO2U21z1yuI-xhuurlNASwlTI6GuzMI2GRxoCrYjJZgdn0XkVanL-OCxNHJv-vZ4yWy-PtCSkDUIxCOjXzuZBin09vjep-IU_Lnee7eGBGbL1QY_aCOVuu7U0jReiKM9X30uw55sJ3CJJcoHVcpW3QhWGnW2OPZWYYfkIxPRsMbP82pN8&src-supplier=Texas+Instruments, ComponentLink2Description=https://datasheet.octopart.com:443/BQ298018RUGR-Texas-Instruments-datasheet-164413062.pdf?src-supplier=SHENGYU+ELECTRONICS, ComponentLink2URL=https://datasheet.octopart.com:443/BQ298018RUGR-Texas-Instruments-datasheet-164413062.pdf?src-supplier=SHENGYU+ELECTRONICS, ComponentLink3Description=http://sigma.octopart.com:80/conflict_mineral_statement/Texas-Instruments-company-63.pdf?src-supplier=Compliance+Statements, ComponentLink3URL=http://sigma.octopart.com:80/conflict_mineral_statement/Texas-Instruments-company-63.pdf?src-supplier=Compliance+Statements, ComponentLink4Description=http://sigma.octopart.com:80/reach_statement/Texas-Instruments-company-64.pdf?src-supplier=Compliance+Statements, ComponentLink4URL=http://sigma.octopart.com:80/reach_statement/Texas-Instruments-company-64.pdf?src-supplier=Compliance+Statements, Height=400µm, Length=1.5mm, Lifecycle Status=Production, Manufacturer Part Number=BQ298018RUGR, Number of Pins=8, RoHS=Compliant, Stock 1=1804, Supplier 1=DigiKey, Thickness=370µm, Width=1.5mm
U7: "Battery Fuel Gauge, Li-Ion, Li-Pol, 2.7V to 4.2V Supply, I2C Interface, DFN-10", Ambient Temperature Range High=85°C, Case/Package=DFN, Manufacturer=STMicroelectronics, Max Junction Temperature (Tj)=150°C, Max Supply Voltage=4.5V, Min Operating Temperature=-40°C, Min Supply Voltage=2.7V, Nominal Supply Current=45µA, Operating Supply Voltage=3.6V, Output Voltage=4.2V, Category="Battery Management", China RoHS=Compliant, ComponentLink1Description=https://datasheet.octopart.com:443/STC3115AIQT-STMicroelectronics-datasheet-62335364.pdf?src-supplier=SHENGYU+ELECTRONICS, ComponentLink1URL=https://datasheet.octopart.com:443/STC3115AIQT-STMicroelectronics-datasheet-62335364.pdf?src-supplier=SHENGYU+ELECTRONICS, ComponentLink2Description=https://datasheet.octopart.com:443/STC3115AIQT-STMicroelectronics-datasheet-16348456.pdf?src-supplier=Future+Electronics, ComponentLink2URL=https://datasheet.octopart.com:443/STC3115AIQT-STMicroelectronics-datasheet-16348456.pdf?src-supplier=Future+Electronics, Height=600µm, Height - Seated (Max)=600µm, Interface=I2C, Lead Free="Lead Free", Length=3mm, Lifecycle Status=Production, Manufacturer Part Number=STC3115AIQT, Max Operating Temperature=85°C, Mount="Surface Mount", Number of Cells=1, Number of Channels=1, Number of Circuits=1, Number of Outputs=1, Number of Pins=10, Number of Terminals=10, Operating Supply Current=45µA, REACH SVHC=Yes, RoHS=Compliant, Schedule B="8542390000, 8542390000|8542390000|8542390000|8542390000|8542390000|8542390000|8542390000|8542390000|8542390000|8542390000|8542390000|8542390000|8542390000|8542390000|8542390000|8542390000|8542390000|8542390000|8542390000|8542390000|8542390000|8542390000|8542390000|85", Stock 1=3658, Supplier 1=DigiKey, Terminal Pitch=500µm, Weight=50.008559mg, Width=2mm
USB1: "CONN RCPT Type-C 16POS SMD R/A"

## Via types
v1: diameter 0.6, hole 0.3, Top Layer to Bottom Layer, tented both sides, 286 vias

## Nets (pads, with @x,y where several pads share a name; then routed paths per layer and width w, separated by ;. In a path a pad name is that pad's centre, name@x,y a point inside that pad or via, vN(x,y) a via of type N, cw(c..) or ccw(c..) an arc to the next point about the centre after c; other vN are vias at no path point)
+3V3: C4.2 C7.2 C8.2 C9.2 C10.2 C11.2 C13.1 C14.2 C22.2 C24.1 C25.2 C26.2 J3.9 J3.10 L1.2 R18.2 R19.2 R24.1 R25.1 TF1.4 U1.2 U3.3 U3.4 U4.16 U5.4 U5.6 U5.9 U5.13 | length 190.2
  Top Layer w0.254: C24.1 v1(29.2,-40) 30.777,-40 U4.16
  Top Layer w0.35: C22.2 19,-26.75 19.376,-26.374 19.376,-26.324 20.262,-25.439 20.262,-25.108 ; U3.3 19.25,-24.596 19.252,-24.598 19.423,-24.598 19.677,-24.852 20.006,-24.852 ; U3.4 19.75,-24.596 20.006,-24.852 ; R18.2 23.825,-30.4 23.915,-30.31 ; v1@26.921,-30.925 R19.2 24.325,-30.9 23.915,-30.49 23.915,-30.31 ; C26.2@37.264,-16.658 37.314,-16.658 38.75,-15.222 ; C25.2 39.589,-17 38.75,-16.161 ; C11.2 55.7,-6.55 ; R24.1@57.4,-18.975 57.453,-19.028 57.828,-19.028 58.224,-19.424 58.473,-19.424 C13.1 ; C14.2 C13.1 ; C10.2 60.25,-12.223 60.25,-11.413 ; U5.4 61.865,-8.885 60.529,-10.221 60.502,-10.221 60.25,-10.473 C9.2 60.25,-11.413 ; U5.13 61.859,-2.633 61.859,-3.641 61.25,-4.25 ; U5.4@61.881,-8.372 61.881,-7.119 62.19,-6.81 64.077,-6.81 ; 64.077,-6.827 64.405,-7.155 64.405,-9.022 64.201,-9.226 C8.2 C7.2 ; U5.9 66.899,-2.673 66.899,-3.601 66.25,-4.25 61.25,-4.25 ; v1(67.7,-25.5) 67.7,-24.7 66.95,-23.95 57.9,-23.95 ; J3.9 J3.10 77.057,-25.25 v1(77.306,-25.5) 77.4,-25.5 79.727,-27.827 C4.2 79.738,-34.211 79.738,-34.838 79.75,-34.85 R25.1 ; 20.006,-24.852 20.262,-25.108 ; 20.262,-25.108 20.774,-25.62 L1.2 ; L1.2 30.68,-25.62 38.75,-17.55 38.75,-16.161 ; L1.2 23.915,-26.285 23.915,-30.31 ; 38.75,-16.161 38.75,-15.222 ; 38.75,-15.222 38.75,-13.75 40,-12.5 42.15,-12.5 43.5,-13.85 ; 43.5,-13.85 43.718,-14.068 43.718,-15.018 TF1.4 43.746,-15.154 43.746,-18.054 40.3,-21.5 40.3,-24 40.6,-24.3 57.55,-24.3 57.9,-23.95 ; 43.5,-13.85 46.25,-11.1 51.15,-11.1 ; 51.15,-11.1 55.7,-6.55 ; 51.15,-11.1 52,-11.1 52.312,-11.413 60.25,-11.413 ; 55.7,-6.55 58,-4.25 61.25,-4.25 ; 57.9,-23.95 57.9,-22.2 57.9,-20.7 58.8,-19.8 C13.1
  Bottom Layer w0.254: v1(27,-31) 27,-37.8 v1(29.2,-40)
  Bottom Layer w0.35: v1(67.7,-25.5) v1(77.306,-25.5)
BAT-: C5.1 J1.1 R14.1 U6.3 | length 33.4
  Top Layer w0.35: R14.1 4.848,-41.248 4.821,-41.248 4.2,-40.626 4.2,-24.8 6.25,-22.75 8.5,-22.75 9.143,-23.393 9.143,-25.318 J1.1 ; R14.1@4.848,-41.274 5.398,-40.723 5.625,-40.723 6.849,-39.498 ; C5.1 6.849,-39.498 ; U6.3 10.625,-38.675 9.5,-39.8 6.998,-39.8 6.849,-39.651 6.849,-39.498
D+: R32.2 U4.5 | length 61.1
  Top Layer w0.156: R32.2 14.2,-14.8 13.3,-15.7 5.6,-15.7 3.3,-18 3.3,-42.5 4.1,-43.3 20,-43.3 21.735,-45.035 U4.5
D-: R34.2 U4.6 | length 61.4
  Top Layer w0.156: R34.2 5.7,-14.4 2.5,-17.6 2.5,-42.9 3.7,-44.1 19.8,-44.1 22.005,-46.305 U4.6
DN: D5.2 R33.1 USB1.A7 USB1.B7 | length 11.7
  Top Layer w0.156: R33.1 18.05,-11.55 19.25,-10.35 D5.2@19.25,-9.6 ; USB1.A7 18.25,-5.05 18.5,-4.8 19,-4.8 19.25,-5.05 USB1.B7 D5.2
DP: D4.2 R32.1 USB1.A6 USB1.B6 | length 10
  Top Layer w0.156: R32.1 14.2,-10.8 15,-10 16.41,-10 17.759,-8.651 17.759,-7.059 ; USB1.B6 17.75,-7.05 17.759,-7.059 ; USB1.A6 18.75,-7.05 18.5,-7.3 18,-7.3 17.759,-7.059
DTR#: R31.1 T1.2 U4.13 | length 6.3
  Top Layer w0.254: U4.13 30.881,-43.824 32.186,-43.824 32.335,-43.972 32.335,-45.26 33.277,-46.202 33.302,-46.202 33.4,-46.3 R31.1 ; R31.1@33.444,-46.302 33.798,-46.302 33.8,-46.3 T1.2 T1.2@35.075,-46.425
EN: C23.1 EN.2 J3.17 R24.2 T2.3 U1.3 | length 123.7
  Top Layer w0.2: T2.3 37.475,-48.8 38.3,-49.625 72.925,-49.625 75.8,-46.75 75.8,-42.9 76.4,-42.3 78.8,-42.3 82.8,-38.3 82.8,-18.9 80.4,-16.5 67.575,-16.5 66.35,-17.725 EN.2 66.307,-17.993 65.443,-17.993 64.9,-17.45 ; C23.1@55.4,-19.701 55.501,-19.701 56.66,-20.86 ; U1.3 56.66,-20.86 ; R24.2 56.76,-18.2 56.66,-18.3 ; J3.17 72.05,-21.75 71,-22.8 66.901,-22.8 65.194,-21.094 64.851,-20.75 64.851,-17.499 64.9,-17.45 ; 56.66,-20.86 56.66,-18.3 ; 56.66,-18.3 56.66,-17.84 58,-16.5 63.95,-16.5 64.9,-17.45
EN1: R15.1 U2.6 | length 2.1
  Top Layer w0.254: R15.1 20.075,-18.8 20.173,-18.702 20.173,-18.427 20.716,-17.884 20.716,-16.98 U2.6
EN2: R16.1 U2.5 | length 17.8
  Top Layer w0.254: U2.5 20.223,-17.322 20.216,-17.329 20.171,-17.329 19.1,-18.4 19.1,-19 19.914,-19.814 30.586,-19.814 31.6,-18.8 R16.1
IO0: BOOT.2 R25.2 T1.3 U1.25 | length 128.4
  Top Layer w0.2: T1.3 37.475,-45.35 40.525,-48.4 72,-48.4 74.9,-45.5 74.9,-42.5 75.9,-41.5 77.8,-41.5 80.75,-38.55 ; v1(67.6,-21.9) 68.7,-21.9 71.877,-18.723 72.852,-18.723 73.4,-18.175 73.4,-17.899 73.799,-17.5 79.6,-17.5 81.4,-19.3 81.4,-37.95 80.8,-38.55 80.75,-38.55 ; R25.2 79,-36.8 80.75,-38.55
  Top Layer w0.254: U1.25 43.038,-39.852 43.038,-32.362 48.9,-26.5 63.7,-26.5 v1(65.1,-25.1)
  Bottom Layer w0.254: v1(65.1,-25.1) 65.1,-23.2 66.4,-21.9 v1(67.6,-21.9)
IO2: A.1 U1.24 | length 33
  Top Layer w0.254: v1@25.65,-29.1 31.1,-29.1 38.915,-36.915 U1.24
  Bottom Layer w0.254: A.1@11.875,-28.5 12.123,-28.748 12.123,-28.978 12.272,-29.127 v1(25.677,-29.127)
IO4: J3.15 U1.26 | length 40.3
  Top Layer w0.254: U1.26 44.308,-39.852 44.308,-37.942 46,-36.25 57.05,-36.25 65.1,-28.2 68.2,-28.2 72.8,-23.6 72.8,-23.3 73.35,-22.75 J3.15
IO5: J3.14 U1.29 | length 36.3
  Top Layer w0.254: U1.29 47.77,-38.33 48.65,-37.45 58.05,-37.45 66.2,-29.3 68.3,-29.3 73.4,-24.2 73.4,-23.7 73.85,-23.25 J3.14